# Altium PCB SensorBoard.PcbDoc
Units mm, origin at the board's own origin, x right, y up, seen from the top; angles counter-clockwise.
Board outline 58.67 x 60.58 mm, 2 copper layers (Top Layer, Bottom Layer); 30 components, 17 nets, 81 pads, 39 vias.
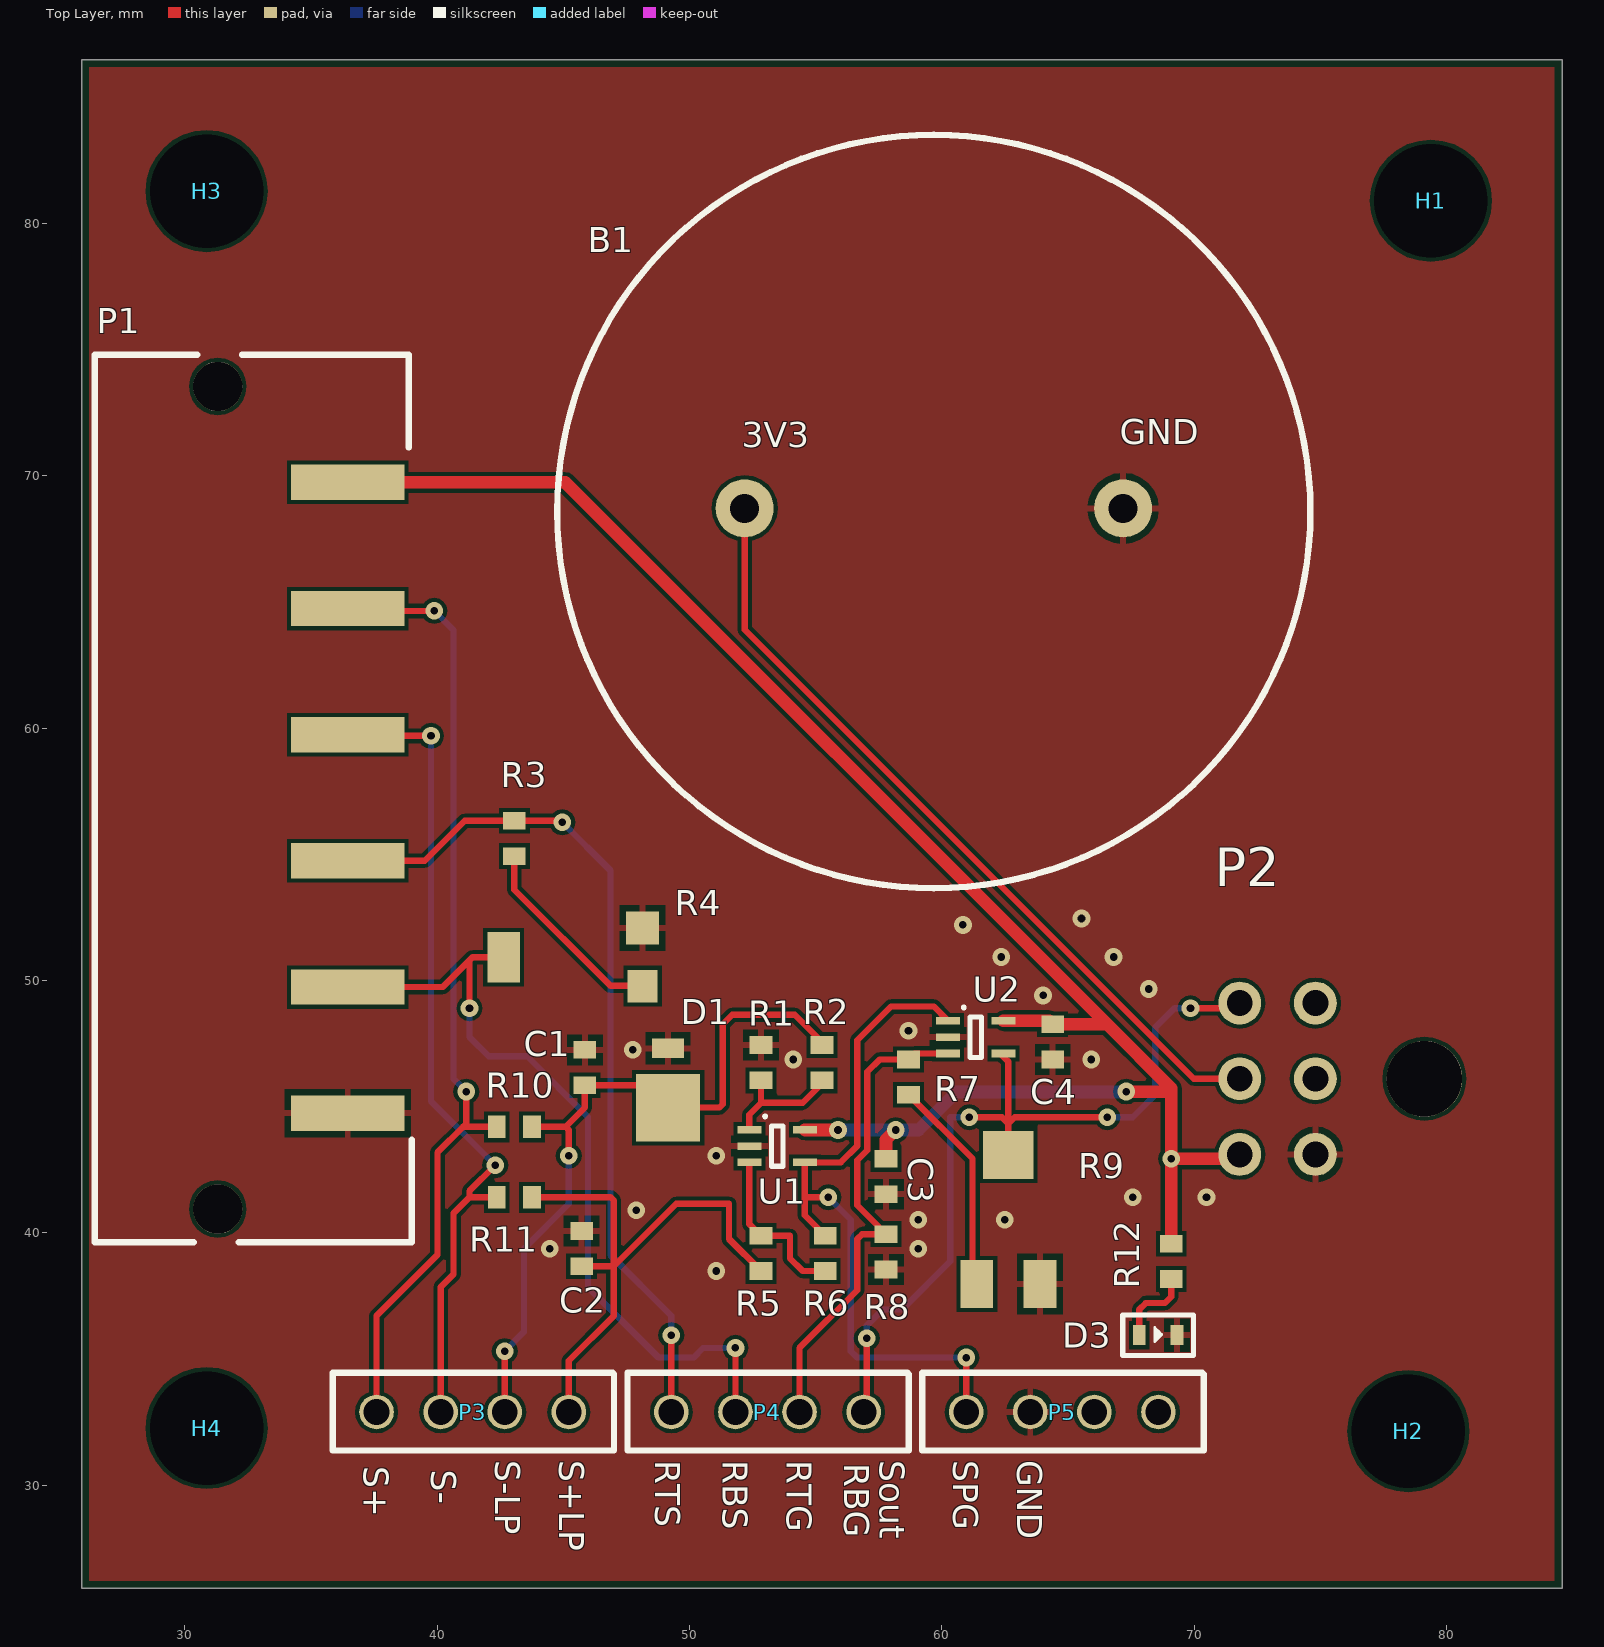
[diagram p0: Top Layer view]
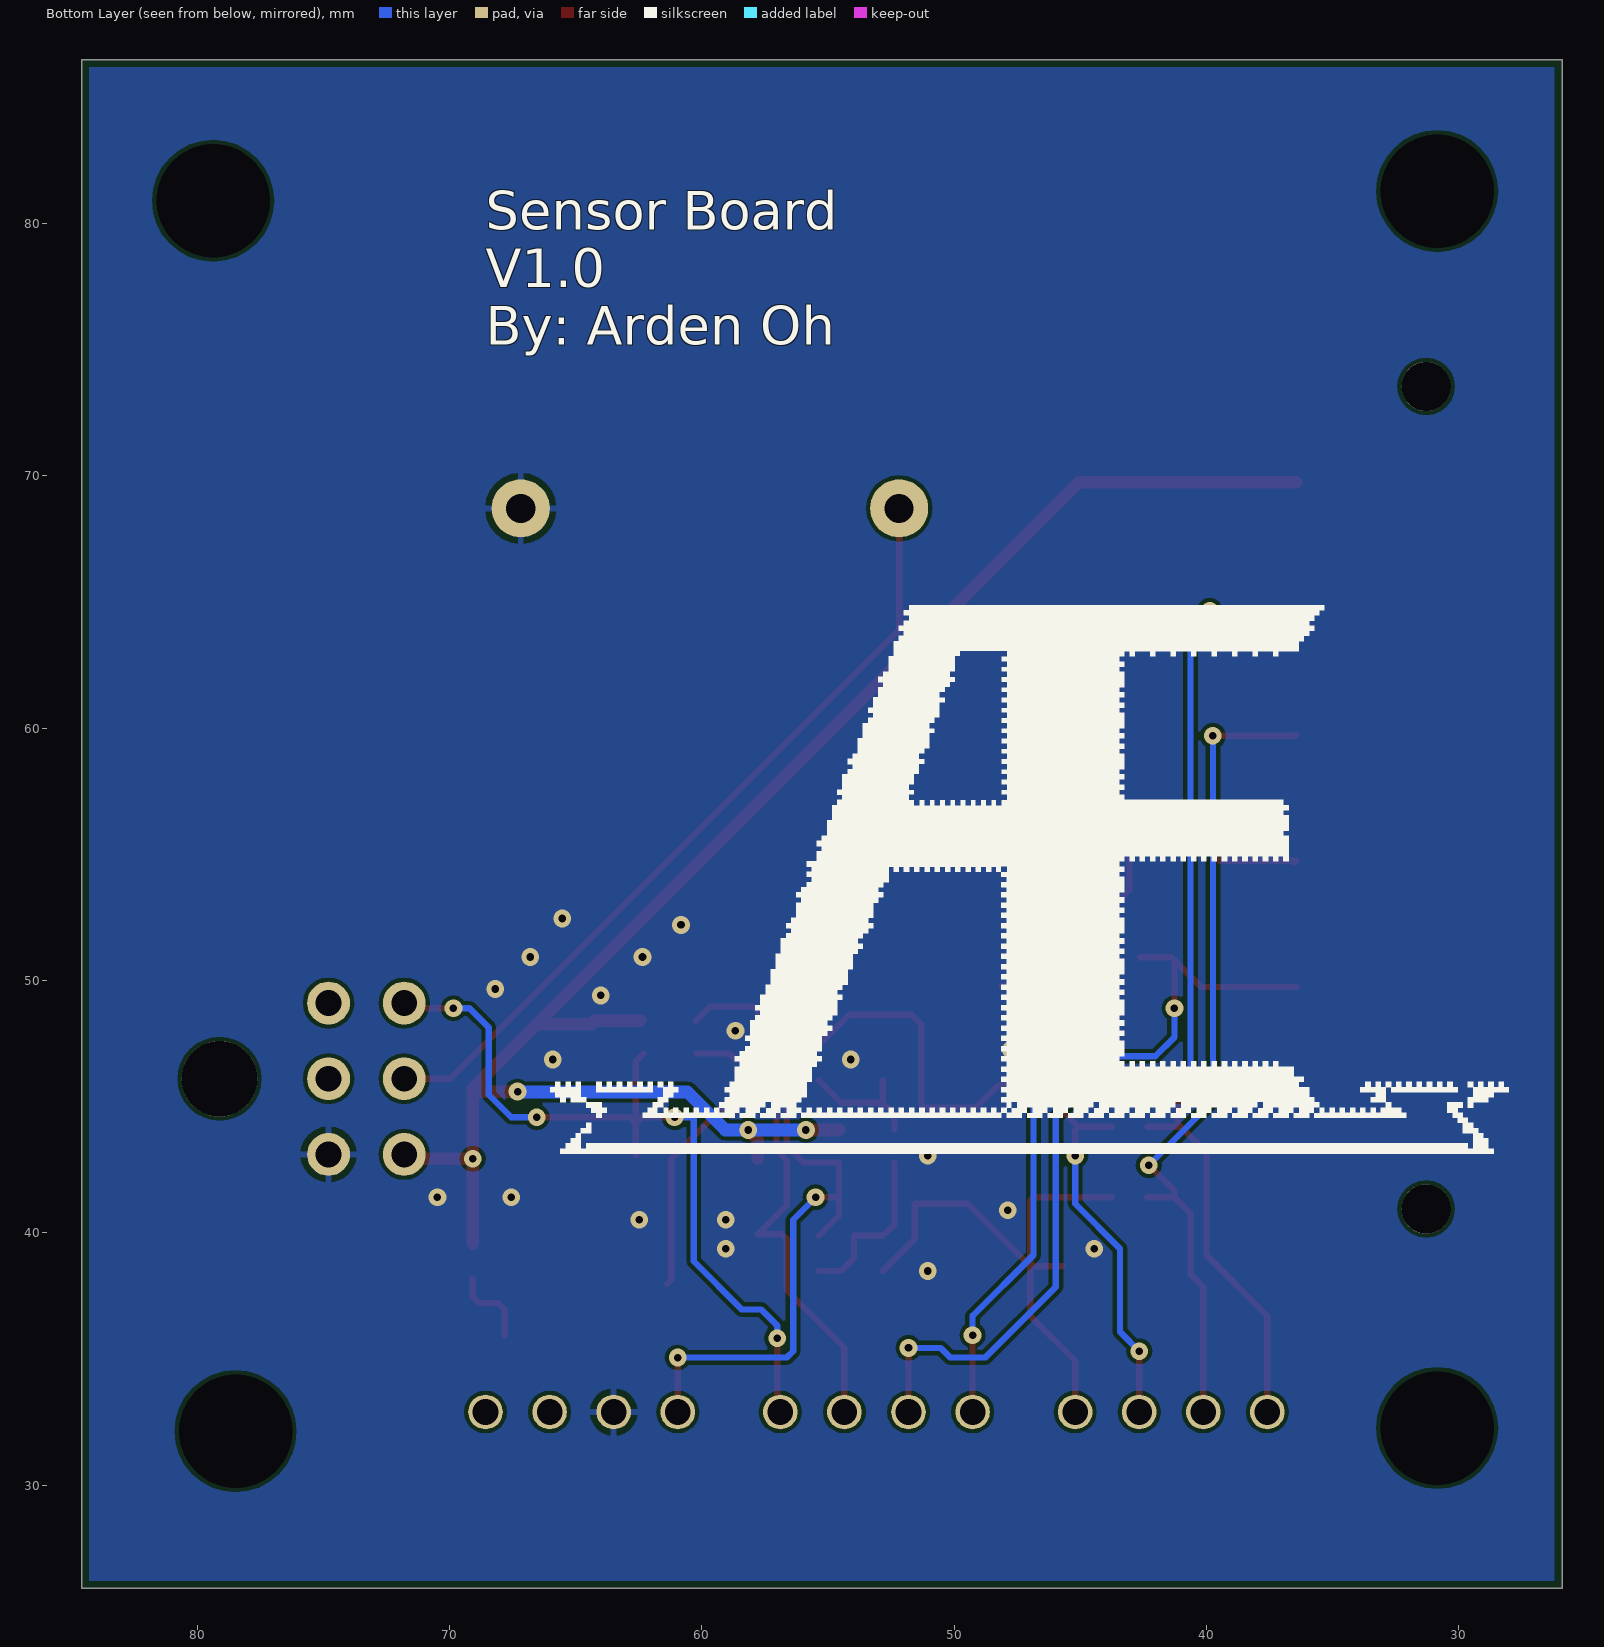
[diagram p1: Bottom Layer view, seen from below]

## Layer stack, top to bottom
Top Solder: solder mask 0.0102, Solder Resist, Dk 3.5
Top Layer: signal copper 0.0356
Dielectric 1: dielectric 0.32, FR-4, Dk 4.8
Bottom Layer: signal copper 0.0356
Bottom Solder: solder mask 0.0102, Solder Resist, Dk 3.5

## Board outline
25.908,25.908 84.582,25.908 84.582,86.487 25.908,86.487

## Design rules (kind name [scope] priority, off if disabled: settings)
BoardOutlineClearance [All] p1: gap=0.3 ignorepadtopadclearanceinfootprint=FALSE
Clearance [All] p1: gap=0.152 ignorepadtopadclearanceinfootprint=FALSE except(0: Arc-Hole Track-Hole SMDPad-Hole THPad-Hole Via-Hole Fill-Hole Poly-Hole Region-Hole Text-Hole)
ComponentClearance [All] p1: gap=0.1 collisioncheckmode=3 verticalgap=0.254 showdistances=FALSE
FabricationTestPointUsage TestPointUsage [All] p1: valid=0 allowmultiple=FALSE
FabricationTestpoint Testpoint [All] p1: side=3 testpointundercomponent=TRUE minsize=1.016 maxsize=2.54 preferedsize=1.524 minholesize=0 maxholesize=1.016 preferedholesize=0.813 testpointgrid=0.025 allowsidetop=TRUE allowsidebottom=TRUE usegrid=TRUE gridtolerance=0
HoleSize [All] p1: absolutevalues=TRUE maxlimit=6.3 minlimit=0.3 maxpercent=80.000 minpercent=20.000
HoleToHoleClearance [All] p1: gap=0.45 allowstackedmicrovias=TRUE
MinimumAnnularRing [All] p1: minimumring=0.15
MinimumSolderMaskSliver [All] p1: minsoldermaskwidth=0.075
PlaneClearance [All] p1: clearance=0.5
PlaneConnect [All] p1: planeconnectstyle=Direct reliefexpansion=0.508 reliefentries=4 reliefconductorwidth=0.254 reliefairgap=0.254
PolygonConnect "GND Via" [isVia AND InNet('GND')] p1: connectstyle=Direct reliefconductorwidth=0.254 reliefentries=4 polygonreliefangle="90 Angle" airgapwidth=0.254 // GND Via Connection
PolygonConnect [All] p2: connectstyle=Relief reliefconductorwidth=0.254 reliefentries=4 polygonreliefangle="90 Angle" airgapwidth=0.25
RoutingVias [All] p1: holewidth=0.3 width=0.6 viastyle="Through Hole" minholewidth=0.3 minwidth=0.6 maxholewidth=6.3 maxwidth=6.6
SilkToSilkClearance [All] p1: silktosilkclearance=0.15
SilkToSolderMaskClearance SilkscreenOverComponentPads [IsPad] p1: minsilkscreentomaskgap=0.25 clearancetoexposedcopper=TRUE
SolderMaskExpansion [All] p1: expansion=0.1
Width [All] p1: maxlimit=2 minlimit=0.152 preferedwidth=0.25 minimp=50.000000 maximp=50.000000 favimp=50.000000
20 further rules are at their usual default settings.

## Components (designator, comment, footprint, x,y, rotation, side; value= is the part's Value field where it differs from the comment)
B1 "3V3 Buzzer" Buzzer_surfacemount 52.183,68.707 r0 top
C1 "C060-0001U-00" PCB_GENERIC_SMD_0603 45.847,46.544 r270 top value=10uF
C2 "C060-0001U-00" PCB_GENERIC_SMD_0603 45.72,39.37 r270 top value=10uF
C3 "C060-0001U-00" PCB_GENERIC_SMD_0603 57.785,42.226 r90 top value=0.1uF
C4 "C060-0001U-00" PCB_GENERIC_SMD_0603 64.389,47.563 r90 top value=0.1uF
D1 "ONSEMI_MBRM110LT1G" "ON Semi Schottky Diode - MBRM110LT1G" 49.149,45.658 r90 top
D3 "LED" SMD_0603_LED 68.565,35.988 r0 top
H1 "Hole M4" M4_Hole 61.849,67.31 r0 top
H2 "Hole M4" M4_Hole 60.96,18.542 r0 top
H3 "Hole M4" M4_Hole 13.335,67.691 r0 top
H4 "Hole M4" M4_Hole 13.335,18.669 r0 top
P1 "Screw Term" 6_Pin_ScrewTerm 36.449,54.737 r270 top
P2 "SCH_MLX_MICROFIT_3X2" PCB_MLX_MICROFIT_3X2 77.311,46.101 r270 top
P3 "4-Pin Vertical Header" "4-Pin Vertical Header" 41.402,32.893 r90 top
P4 "4-Pin Vertical Header" "4-Pin Vertical Header" 53.086,32.893 r90 top
P5 "4-Pin Vertical Header" "4-Pin Vertical Header" 64.77,32.893 r90 top
R1 "SCH_GENERIC_RESISTOR_0603" PCB_GENERIC_SMD_0603 52.832,46.736 r90 top
R2 "SCH_GENERIC_RESISTOR_0603" PCB_GENERIC_SMD_0603 55.245,46.736 r270 top
R3 "SCH_GENERIC_RESISTOR_0603" PCB_GENERIC_SMD_0603 43.053,55.626 r270 top
R4 "10R Trim" 10ohm1Turn_pot 48.133,52.07 r270 top
R5 "SCH_GENERIC_RESISTOR_0603" PCB_GENERIC_SMD_0603 52.832,39.181 r90 top
R6 "SCH_GENERIC_RESISTOR_0603" PCB_GENERIC_SMD_0603 55.372,39.181 r90 top
R7 "SCH_GENERIC_RESISTOR_0603" PCB_GENERIC_SMD_0603 58.674,46.166 r270 top
R8 "SCH_GENERIC_RESISTOR_0603" PCB_GENERIC_SMD_0603 57.785,39.243 r90 top
R9 "10k 5 Turn" 10k5TurnPot 61.381,37.973 r90 top
R10 "SCH_GENERIC_RESISTOR_0603" PCB_GENERIC_SMD_0603 43.053,44.196 r0 top
R11 "SCH_GENERIC_RESISTOR_0603" PCB_GENERIC_SMD_0603 43.053,41.402 r0 top
R12 "SCH_GENERIC_RESISTOR_0603" PCB_GENERIC_SMD_0603 69.088,38.862 r90 top
U1 "MCP6001U" MCP6001UT 53.467,43.434 r0 top
U2 "MCP6001U" MCP6001UT 61.341,47.752 r0 top

## Footprints (in the part's own frame and the unit in brackets; to place one, negate y for a bottom-side part, rotate by r counter-clockwise, add the part's x,y. Pads: shape width x height; smd on the part's side, far side on the other; paste and mask are expansions set on the pad)
"4-Pin Vertical Header" [mil]
  round 54 hole 40: 1(0,150) 2(0,50) 3(0,-50) 4(0,-150)
  silkscreen extent -60,-220 61,219, body extent -50,-210 50,210, height 335
6_Pin_ScrewTerm [mm]
  rect 1.4x4.5 smd: 1(-15,0) 2(-10,0) 3(-5,0) 5(5,0) 6(10,0)
  rect 1.4x4.5 smd mask+0.102: 4(0,0)
  round 1.95 hole 1.95: ""(-18.8,-5.15) ""(13.8,-5.15)
  silkscreen extent -20.07,-10.03 15.11,2.54, body extent -19.59,-9.76 14.51,1.79, height 10.95
10k5TurnPot [mm]
  rect 1.9x1.3 smd: 1(0,0) 3(0,-2.5)
  rect 1.9x2 smd: 2(5.1,-1.25)
  body extent -0.43,-3.68 5.26,1.14, height 5.29
10ohm1Turn_pot [mm]
  rect 1.3x1.3 smd: 1(0,0)
  rect 2x1.3 smd: 2(1.15,-5.5)
  rect 1.3x1.2 smd: 3(2.3,0)
  body extent -1.44,-5.77 3.56,0.43, height 2.75
Buzzer_surfacemount [mm]
  round 2.3 hole 1.15: 1(0,0) 2(15,0)
  silkscreen extent -7.44,-15.06 22.42,14.8
M4_Hole [mil]
  round 0 hole 177.17 unplated mask+78.74: 1(690,535)
MCP6001UT [mm]
  rect 0.95x0.3 smd: 1(-1.1,0.65) 2(-1.1,0) 3(-1.1,-0.65) 4(1.1,-0.65) 5(1.1,0.65)
  silkscreen extent -0.5,-0.8 0.23,1.2
"ON Semi Schottky Diode - MBRM110LT1G" [mm]
  rect 2.67x2.54 smd: 1(-0.7,0)
  rect 0.762x1.27 smd: 2(1.649,0)
  body extent -1.97,-1.65 0.95,1.65, height 1.02
PCB_GENERIC_SMD_0603 [mm]
  rect 0.7x0.9 smd: 1(-0.7,0) 2(0.7,0)
  body extent -0.85,-0.45 0.85,0.45, height 0.55
PCB_MLX_MICROFIT_3X2 [mm]
  round 1.7 hole 1.02: 1(-3,-2.51) 2(0,-2.51) 3(3,-2.51) 4(-3,-5.51) 5(0,-5.51) 6(3,-5.51)
  round 3 hole 3 unplated: ""(0,1.81)
  body extent -6.58,-5.78 6.57,6.46, height 8.83
SMD_0603_LED [mm]
  rect 0.5x0.8 smd: 1(-0.747,-0.047) 2(0.753,-0.047)
  silkscreen extent -1.4,-0.85 1.4,0.75, body extent -0.75,-0.55 0.75,0.45, height 0.45

## Part data
B1: library part Buzzer_surfacemount, "AUDIO PIEZO INDICATOR 2-5V TH", Supplier Part Number=668-1204-ND, Supplier=Digikey
C1 C2 C3 C4: "CAP CER 0603 1uF 16V X5R 20%", Package=0603, Tolerance=20%, Voltage=16V
D1: "DIODE SCHOTTKY 10V 1A", Supplier Part Number 1=MBRM110LT1GOSDKR-ND, Supplier 1=Digi-Key
D3: library part SMD_0603_LED
H1 H2 H3 H4: library part Component_1
P1: library part Component_1, "CONN TERM BLOCK 6POS 5MM BLACK", Supplier Part Number=1297-1112-2-ND, Supplier=Digikey
P3 P4 P5: Manufacturer=Sullins, Manufacturer No.=PPPC041LFBN-RC
R1 R2 R5 R6: "Generic SMD resistor 0603", Resistance=10k
R3: "Generic SMD resistor 0603", Resistance=2R
R4: library part 10ohm1Turn_pot, "TRIMMER 10 OHM 0.25W SMD", Supplier Part Number=3314G-1-100ECT-ND, Supplier=Digikey
R7: "Generic SMD resistor 0603", Resistance=30k
R8: "Generic SMD resistor 0603", Resistance=100R
R9: "TRIMMER 10K OHM 0.25W SMD", Supplier Part Number=3214X-1-103ECT-ND, Supplier=Digikey
R10 R11: "Generic SMD resistor 0603", Resistance=150R
R12: "Generic SMD resistor 0603", Resistance=500R

## Via types
v1: diameter 0.7, hole 0.3, Top Layer to Bottom Layer, 39 vias

## Nets (pads, with @x,y where several pads share a name; then routed paths per layer and width w, separated by ;. In a path a pad name is that pad's centre, name@x,y a point inside that pad or via, vN(x,y) a via of type N, cw(c..) or ccw(c..) an arc to the next point about the centre after c; other vN are vias at no path point)
5V: C3.2 C4.2 P1.1 P2.6 R12.2 U1.5 U2.5 | length 72.2
  Top Layer w0.5: P1.1 45.071,69.737 66.545,48.263 ; U1.5 54.582,44.069 v1(55.88,44.069) ; C3.2 57.785,43.688 v1(58.166,44.069) ; U2.5 64.25,48.402 C4.2 66.545,48.263 ; v1(67.31,45.593) 68.961,45.593 69.088,45.72 ; R12.2 69.088,42.164 v1(69.088,42.926) ; P2.6 71.626,42.926 v1(69.088,42.926) ; 66.545,48.263 69.088,45.72 ; v1(69.088,42.926) 69.088,45.72
  Bottom Layer w0.5: v1(55.88,44.069) v1(58.166,44.069) 59.071,44.069 60.579,45.577 67.294,45.577 v1(67.31,45.593)
Buzz: B1.1 P2.5 | length 31.8
  Top Layer w0.25: B1.1 52.183,63.895 69.977,46.101 P2.5
GND: B1.2 C1.1 C2.1 C3.1 C4.1 D1.2 D3.2 P1.6 P2.3 P5.2 R1.2 R4.1 R8.1 R9.3 U1.2 U2.2
  other v1: 51.054,38.481 44.45,39.37 59.055,39.37 59.055,40.513 62.484,40.513 47.879,40.894 67.564,41.402 70.485,41.402 51.054,43.053 54.102,46.863 65.913,46.863 47.752,47.244 58.674,48.006 64.008,49.403 68.199,49.657 62.357,50.927 66.802,50.927 60.833,52.197 65.532,52.451
NetD3_1: D3.1 R12.1 | length 3.2
  Top Layer w0.25: D3.1 67.818,36.957 68.072,37.211 68.834,37.211 69.088,37.465 R12.1
NetR1_1: R1.1 R2.2 U1.1 | length 5.1
  Top Layer w0.25: U1.1 52.367,44.68 52.832,45.145 ; R1.1 52.832,45.145 ; R2.2@55.372,46.036 54.481,45.145 52.832,45.145
NetR3_2: R3.2 R4.3 | length 8
  Top Layer w0.25: R3.2 43.053,53.594 46.863,49.784 48.119,49.784 R4.3
NetR5_2: R5.2 R6.1 U1.3 | length 6.7
  Top Layer w0.25: U1.3 52.367,40.346 R5.2 52.835,39.878 53.975,39.878 53.975,38.989 54.483,38.481 R6.1
NetR7_2: R7.2 R9.1 | length 8.6
  Top Layer w0.25: R7.2 61.214,42.926 61.214,38.14 R9.1
ResBot-G: P2.4 P4.4 R9.2 U2.4 | length 32.8
  Top Layer w0.25: P4.4 57.023,33.02 v1(57.023,35.814) ; v1(61.087,44.577) 62.377,44.577 62.631,44.323 ; U2.4@62.314,47.102 62.631,46.785 62.631,44.323 ; R9.2 62.631,44.323 ; v1(66.548,44.577) 62.885,44.577 62.631,44.323 ; v1(69.85,48.895) 71.595,48.895 P2.4
  Bottom Layer w0.25: v1(57.023,35.814) 57.023,36.322 57.658,36.957 58.42,36.957 60.325,38.862 60.325,44.577 v1(61.087,44.577) ; v1(66.548,44.577) 67.564,44.577 68.453,45.466 68.453,48.133 69.215,48.895 v1(69.85,48.895)
ResBot-S: P1.5 P4.2 R4.2 | length 32.2
  Top Layer w0.25: P1.5 40.212,49.737 41.275,50.8 ; v1(41.275,48.895) 41.275,50.8 ; R4.2 41.395,50.92 41.275,50.8 ; P4.2 v1(51.816,35.433)
  Bottom Layer w0.25: v1(41.275,48.895) 41.275,47.752 42.037,46.99 43.561,46.99 45.974,44.577 45.974,37.846 48.768,35.052 50.165,35.052 50.546,35.433 v1(51.816,35.433)
ResTop-G: P4.3 R7.1 R8.2 U2.3 | length 19.6
  Top Layer w0.25: P4.3 54.356,35.433 56.642,37.719 56.642,39.751 56.834,39.943 R8.2 56.642,41.086 56.642,42.865 57.044,43.267 57.044,46.376 57.534,46.866 R7.1 58.91,47.102 U2.3
ResTop-S: P1.4 P4.1 R3.1 | length 34.4
  Top Layer w0.25: P1.4@36.511,54.675 P1.4 39.497,54.737 41.086,56.326 R3.1 44.893,56.326 v1(44.958,56.261) ; P4.1 v1(49.276,35.941)
  Bottom Layer w0.25: v1(44.958,56.261) 46.863,54.356 46.863,39.116 49.276,36.703 v1(49.276,35.941)
S+: P1.2 P3.1 R10.1 | length 38.5
  Top Layer w0.25: P1.2 36.543,64.643 v1(39.878,64.643) ; P3.1 37.592,36.703 40.005,39.116 40.005,43.18 41.021,44.196 ; v1(41.148,45.593) 41.148,44.323 41.021,44.196 ; R10.1 41.021,44.196
  Bottom Layer w0.25: v1(39.878,64.643) 40.64,63.881 40.64,46.101 v1(41.148,45.593)
"S+ LP": C1.2 D1.1 P3.3 R2.1 R10.2 | length 29.5
  Top Layer w0.25: P3.3 v1(42.672,35.306) ; R10.2 45.085,44.196 ; v1(45.212,43.053) 45.212,44.069 45.085,44.196 ; R2.1@55.372,47.436 54.167,48.641 51.689,48.641 51.308,48.26 51.308,45.085 51.181,44.958 D1.1 48.263,45.844 C1.2 45.847,44.958 45.085,44.196
  Bottom Layer w0.25: v1(42.672,35.306) 43.434,36.068 43.434,39.37 45.212,41.148 v1(45.212,43.053)
S-: P1.3 P3.2 R11.1 | length 33.1
  Top Layer w0.25: P1.3 36.496,59.69 v1(39.751,59.69) ; P3.2 40.132,37.846 40.64,38.354 40.64,40.767 41.275,41.402 ; v1(42.291,42.672) 41.275,41.656 41.275,41.402 ; R11.1 41.275,41.402
  Bottom Layer w0.25: v1(39.751,59.69) 39.751,45.212 v1(42.291,42.672)
"S- LP": C2.2 P3.4 R5.1 R11.2 | length 22.5
  Top Layer w0.25: R11.2 46.863,41.402 46.987,41.278 46.987,38.67 ; P3.4 45.212,34.925 46.987,36.7 46.987,38.67 ; C2.2 46.987,38.67 ; R5.1 51.562,39.751 51.562,41.148 49.465,41.148 46.987,38.67
S-Pregain: P5.1 R6.2 U1.4 U2.1 | length 28.4
  Top Layer w0.25: R6.2 54.567,40.686 54.567,41.402 ; v1(55.499,41.402) 54.567,41.402 ; U2.1 59.675,48.968 57.985,48.968 56.642,47.625 56.642,43.434 55.992,42.784 U1.4 54.567,41.402 ; P5.1 v1(60.96,35.052)
  Bottom Layer w0.25: v1(55.499,41.402) 56.388,40.513 56.388,35.306 56.642,35.052 v1(60.96,35.052)
pads on no net: H1.1 H2.1 H3.1 H4.1 P1. P2. P2.1 P2.2 P5.3 P5.4

## Polygon pours and split planes (outlines as drawn)
GND on Bottom Layer "BottomLayer-GND" (solid, pour order 18): 23.876,26.162
GND on Bottom Layer "BottomLayer-GND" (solid, pour order 24): 26.543,85.598
GND on Bottom Layer "BottomLayer-GND" (solid, pour order 26): 25.273,86.741 25.4,86.868 85.09,86.868 85.09,25.146 84.963,25.273 25.146,25.273
GND on Top Layer "BottomLayer-GND" (solid, pour order 28): 25.019,86.868 85.09,86.868 85.217,86.995 85.217,25.4 25.273,25.4

## Silkscreen, mask and mechanical layers (free items; w line width, h text height)
Top Overlay:
  text "S-LP" at 42.291,30.988 h1 r270
  text "S+LP" at 44.831,30.988 h1 r270
  text "RTS" at 48.641,30.988 h1 r270
  text "RBS" at 51.308,30.988 h1 r270
  text "RTG" at 53.848,30.988 h1 r270
  text "Sout" at 57.531,30.988 h1 r270
  text "SPG" at 60.452,30.988 h1 r270
  text "GND" at 62.992,30.988 h1 r270
  text "RBG" at 56.134,30.861 h1 r270
  text "S+" at 37.084,30.734 h1 r270
  text "S-" at 39.751,30.607 h1 r270
Bottom Overlay:
  drawing of 7 lines, arcs and shapes, not listed
  text "Sensor Board / V1.0 / By: Arden Oh" at 68.58,75.184 h1.52
Mechanical 1:
  lines w0.1: 25.908,28.575 25.908,86.487 84.582,86.487 84.582,25.908 25.908,25.908 25.908,31.369

## Text inside footprints (layer, text, board x,y; h text height)
B1: Top Overlay "GND" at 67.042,71.247 h1; Top Overlay "3V3" at 52.056,71.12 h1